# EAGLE board Verteilerplatine_Universal_LoetJumper_2x (EAGLE 9.2.2)
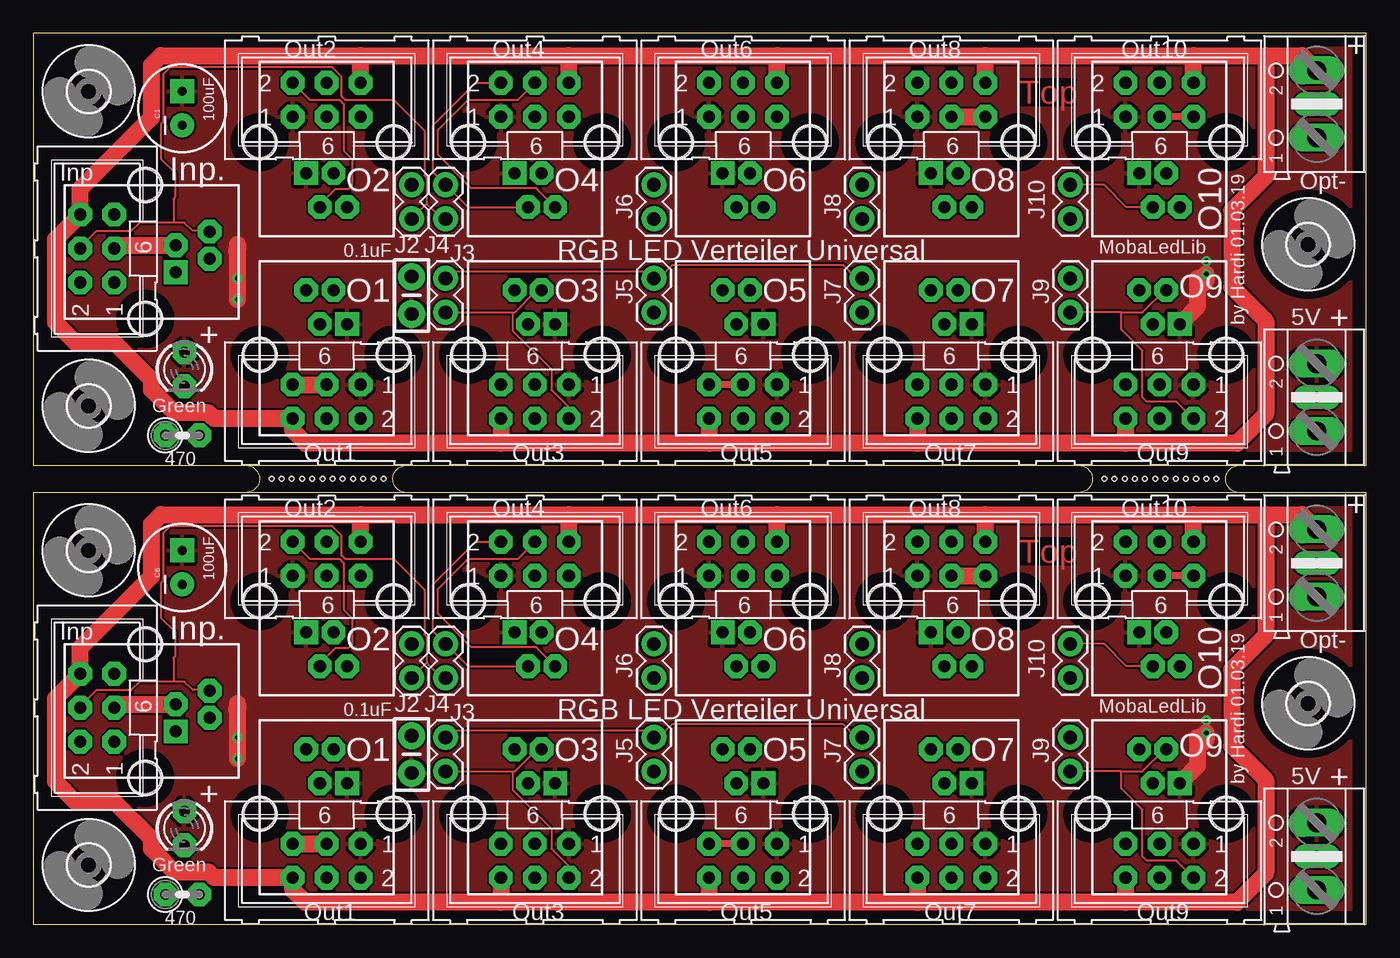
[diagram p0: board, top side]
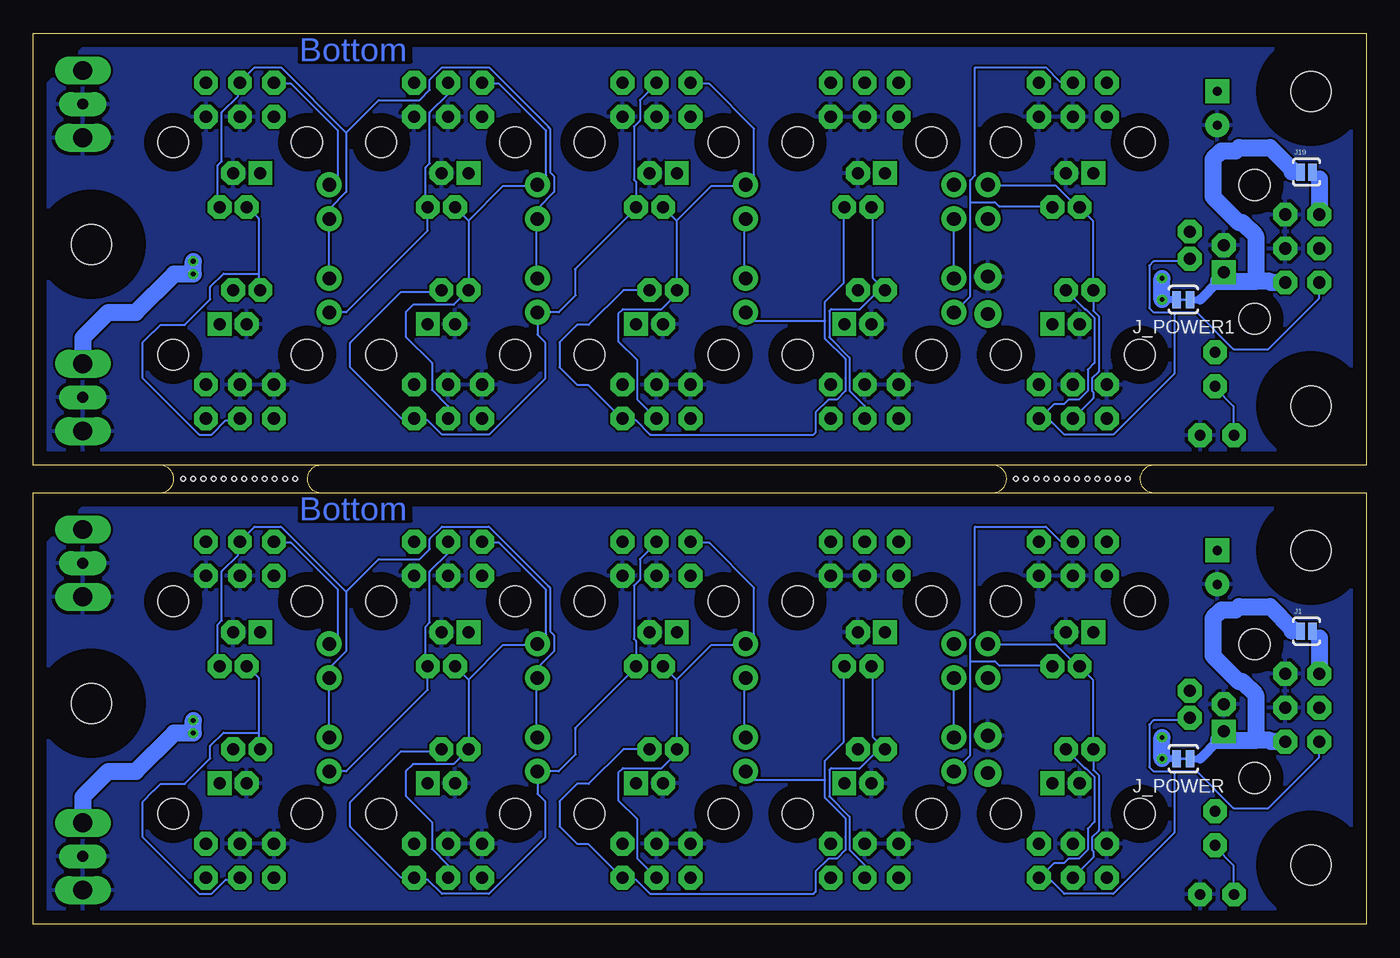
[diagram p1: board, bottom side, seen from below]

Size 99.57 x 66.55 mm. Coordinates in mm from the lower left corner, seen from the top.
Outline: 90.12,32.26 99.57,32.26 99.57,0 0,0 0,32.26 15.9,32.26
Outline: 90.12,32.26 78.13,32.26
Outline: 78.13,32.26 27.89,32.26
Outline: 27.89,32.26 15.9,32.26
Outline: 15.85,34.29 0,34.29 0,66.55 99.57,66.55 99.57,34.29 90.07,34.29
Outline: 15.85,34.29 27.84,34.29
Outline: 27.84,34.29 78.08,34.29
Outline: 78.08,34.29 90.07,34.29
Outline: 27.89,32.26 arc-180 27.84,34.29
Outline: 15.85,34.29 arc-180 15.9,32.26
Outline: 90.12,32.26 arc-180 90.07,34.29
Outline: 78.08,34.29 arc-180 78.13,32.26
Copper layers (1*16): Top 0.035mm / dielectric 1.5mm / Bottom 0.035mm
Design rules "default *": minimum track width 6mil, minimum drill 0.35mm, track to track 6mil, track to pad 6mil, pad to pad 6mil, via to via 6mil, smd to smd 6mil, copper to edge 40mil, drill to drill 6mil, minimum pad ring 10mil, minimum via ring 8mil, stop-mask expansion 4mil, vias tented up to drill 0mil, thermal gap 10mil
Holes 0.35 mm at 17.78,33.27 18.54,33.27 19.3,33.27 20.07,33.27 20.83,33.27 21.59,33.27 22.35,33.27 23.11,33.27 23.88,33.27 24.64,33.27 25.4,33.27 26.16,33.27 80.01,33.27 80.77,33.27 81.53,33.27 82.3,33.27 83.06,33.27 83.82,33.27 84.58,33.27 85.34,33.27 86.11,33.27 86.87,33.27 87.63,33.27 88.39,33.27

## Footprints (pad centres in the part's own frame; a part is rotated, then mirrored left to right if it is on the bottom)
SPARKFUN-CAPACITORS_CPOL-RADIAL-100UF-25V = drill 0.7 pad 1.778 square: 1 1.27,0 | drill 0.7 pad 1.778: 2 -1.27,0
CAP-PTH-SMALL-KIT = drill 1.016 pad 2.032: 1 -1.397,0; 2 1.397,0
3,0 = hole 3: 0,0
ML6 = drill 0.914 pad 1.778 octagon: 1 -2.54,-1.27; 2 -2.54,1.27; 3 0,-1.27; 4 0,1.27; 5 2.54,-1.27; 6 2.54,1.27
RJ10 = drill 0.9 pad 1.778 square: 1 -1.524,-2.3 | drill 0.9 pad 1.778 octagon: 2 -0.508,-4.84; 3 0.508,-2.3; 4 1.524,-4.84 | hole 2.3: 5,0; -5,0
SJ_2S-NO = smd 0.635 x 1.27: 1 -0.45,0; 2 0.45,0
1X02 = drill 1.016 pad 1.88: 1 0,0; 2 2.54,0
SJ_2S-TRACE = smd 0.635 x 1.27: 1 -0.508,0; 2 0.508,0
LED_LED3MM = drill 0.813 pad 1.778 octagon: A -1.27,0; K 1.27,0
RCL_0207/2V = drill 0.813 pad 1.778 octagon: 1 -1.27,0; 2 1.27,0
AK500/2+M = drill 1.397 long: 1 -2.515,0; 2 2.515,0 | drill 0.813 pad 1.778 long: M 0,0

## Placement (x,y rotation side)
C1  100uF  [SPARKFUN-CAPACITORS_CPOL-RADIAL-100UF-25V]  11.11,60.96 90 top
C2  0.1uF  [CAP-PTH-SMALL-KIT]  28.26,46.99 270 top
C8  100uF  [SPARKFUN-CAPACITORS_CPOL-RADIAL-100UF-25V]  11.11,26.67 90 top
C9  0.1uF  [CAP-PTH-SMALL-KIT]  28.26,12.7 270 top
H1  MOUNT-HOLE3.0  [3,0]  4.13,62.23 0 top
H2  MOUNT-HOLE3.0  [3,0]  4.13,38.73 0 top
H3  MOUNT-HOLE3.0  [3,0]  95.25,50.8 0 top
H5  MOUNT-HOLE3.0  [3,0]  4.13,27.94 0 top
H6  MOUNT-HOLE3.0  [3,0]  4.13,4.45 0 top
H8  MOUNT-HOLE3.0  [3,0]  95.25,16.51 0 top
INP1  [ML6]  4.76,50.48 90 top
INP6  [ML6]  4.76,16.19 90 top
INP_  RJ10  [RJ10]  8.33,15.94 90 top
INP_1  RJ10  [RJ10]  8.33,50.23 90 top
J1  SOLDERJUMPERNO  [SJ_2S-NO]  4.45,21.91 0 bottom
J2  SIG  [1X02]  28.26,18.41 90 top
J3  SIG  [1X02]  30.8,13.97 270 top
J4  SIG  [1X02]  30.8,18.41 90 top
J5  SIG  [1X02]  46.35,13.97 270 top
J6  SIG  [1X02]  46.35,18.41 90 top
J7  SIG  [1X02]  61.91,13.97 270 top
J8  SIG  [1X02]  61.91,18.41 90 top
J9  SIG  [1X02]  77.47,13.97 270 top
J10  SIG  [1X02]  77.47,18.41 90 top
J11  SIG  [1X02]  77.47,52.7 90 top
J12  SIG  [1X02]  30.8,48.26 270 top
J13  SIG  [1X02]  30.8,52.7 90 top
J14  SIG  [1X02]  46.35,48.26 270 top
J15  SIG  [1X02]  46.35,52.7 90 top
J16  SIG  [1X02]  61.91,48.26 270 top
J17  SIG  [1X02]  61.91,52.7 90 top
J18  SIG  [1X02]  77.47,48.26 270 top
J19  SOLDERJUMPERNO  [SJ_2S-NO]  4.45,56.2 0 bottom
J20  SIG  [1X02]  28.26,52.7 90 top
J_POWER  SOLDERJUMPERTRACE  [SJ_2S-TRACE]  13.65,12.38 0 bottom
J_POWER1  SOLDERJUMPERTRACE  [SJ_2S-TRACE]  13.65,46.67 0 bottom
LED  Green  [LED_LED3MM]  11.28,7.18 270 top
LED1  Green  [LED_LED3MM]  11.28,41.47 270 top
O1  [ML6]  21.91,4.76 180 top
O2  [ML6]  21.91,27.3 0 top
O3  [ML6]  37.47,4.76 180 top
O4  [ML6]  37.47,27.3 0 top
O5  [ML6]  53.02,4.76 180 top
O6  [ML6]  53.02,27.3 0 top
O7  [ML6]  68.58,4.76 180 top
O8  [ML6]  68.58,27.3 0 top
O9  [ML6]  84.14,4.76 180 top
O10  [ML6]  84.14,27.3 0 top
O11  [ML6]  21.91,61.59 0 top
O12  [ML6]  21.91,39.05 180 top
O13  [ML6]  37.47,39.05 180 top
O14  [ML6]  37.47,61.59 0 top
O15  [ML6]  53.02,39.05 180 top
O16  [ML6]  53.02,61.59 0 top
O17  [ML6]  68.58,39.05 180 top
O18  [ML6]  68.58,61.59 0 top
O19  [ML6]  84.14,39.05 180 top
O20  [ML6]  84.14,61.59 0 top
OUT1  RJ10  [RJ10]  21.91,8.26 180 top
OUT2  RJ10  [RJ10]  21.91,24.13 0 top
OUT3  RJ10  [RJ10]  37.47,8.26 180 top
OUT4  RJ10  [RJ10]  37.47,24.13 0 top
OUT5  RJ10  [RJ10]  53.02,8.26 180 top
OUT6  RJ10  [RJ10]  53.02,24.13 0 top
OUT7  RJ10  [RJ10]  68.58,8.26 180 top
OUT8  RJ10  [RJ10]  68.58,24.13 0 top
OUT9  RJ10  [RJ10]  84.14,8.26 180 top
OUT10  RJ10  [RJ10]  84.14,24.13 0 top
OUT11  RJ10  [RJ10]  21.91,42.55 180 top
OUT12  RJ10  [RJ10]  84.14,58.42 0 top
OUT13  RJ10  [RJ10]  21.91,58.42 0 top
OUT14  RJ10  [RJ10]  37.47,42.55 180 top
OUT15  RJ10  [RJ10]  37.47,58.42 0 top
OUT16  RJ10  [RJ10]  53.02,42.55 180 top
OUT17  RJ10  [RJ10]  53.02,58.42 0 top
OUT18  RJ10  [RJ10]  68.58,42.55 180 top
OUT19  RJ10  [RJ10]  68.58,58.42 0 top
OUT20  RJ10  [RJ10]  84.14,42.55 180 top
R1  470  [RCL_0207/2V]  11.13,36.53 0 top
R21  470  [RCL_0207/2V]  11.13,2.24 0 top
X1  AK500/2+M  [AK500/2+M]  95.89,26.99 90 top
X2  AK500/2+M  [AK500/2+M]  95.89,5.08 90 top
X3  AK500/2+M  [AK500/2+M]  95.89,39.37 90 top
X4  AK500/2+M  [AK500/2+M]  95.89,61.28 90 top

## Library data of the parts
C1 C8 = Sound_MP3-TF-16P_and_WS2811; PROD_ID: CAP-08439
C2 C9 = SparkFun-Capacitors; PROD_ID: CAP-08370
H1-H3 H5 H6 H8 = holes
INP1 INP6 O1-O20 = con-harting-ml; OC_FARNELL: unknown; OC_NEWARK: unknown
INP_ INP_1 OUT1-OUT20 = RJ10; OC_FARNELL: unknown; OC_NEWARK: unknown
J1 J19 J_POWER J_POWER1 = SparkFun-Retired
J2-J18 J20 = SparkFun-Connectors
LED LED1 = Sound_MP3-TF-16P_and_WS2811
R1 R21 = Sound_MP3-TF-16P_and_WS2811; SPICEPREFIX: R
X1-X4 = Arduino_fuer_LEDs_DCC_2

## Nets
5V: C8.1 C9.2 J_POWER.1 LED.A O1.1 O2.1 O3.1 O4.1 O5.1 O6.1 O7.1 O8.1 O9.1 O10.1 OUT1.1 OUT2.1 OUT3.1 OUT4.1 OUT5.1 OUT6.1 OUT7.1 OUT8.1 OUT9.1 OUT10.1 X2.2
5V1: C1.1 C2.2 J_POWER1.1 LED1.A O11.1 O12.1 O13.1 O14.1 O15.1 O16.1 O17.1 O18.1 O19.1 O20.1 OUT11.1 OUT12.1 OUT13.1 OUT14.1 OUT15.1 OUT16.1 OUT17.1 OUT18.1 OUT19.1 OUT20.1 X3.2
GND: C8.2 C9.1 INP6.3 INP6.5 INP_.3 O1.3 O1.5 O2.3 O2.5 O3.3 O3.5 O4.3 O4.5 O5.3 O5.5 O6.3 O6.5 O7.3 O7.5 O8.3 O8.5 O9.3 O9.5 O10.3 O10.5 OUT1.3 OUT2.3 OUT3.3 OUT4.3 OUT5.3 OUT6.3 OUT7.3 OUT8.3 OUT9.3 OUT10.3 R21.2 X1.1 X1.M X2.1 X2.M
GND1: C1.2 C2.1 INP1.3 INP1.5 INP_1.3 O11.3 O11.5 O12.3 O12.5 O13.3 O13.5 O14.3 O14.5 O15.3 O15.5 O16.3 O16.5 O17.3 O17.5 O18.3 O18.5 O19.3 O19.5 O20.3 O20.5 OUT11.3 OUT12.3 OUT13.3 OUT14.3 OUT15.3 OUT16.3 OUT17.3 OUT18.3 OUT19.3 OUT20.3 R1.2 X3.1 X3.M X4.1 X4.M
N$1: J10.2 O9.4 O10.2 OUT9.4 OUT10.2
N$2: J7.2 O6.4 O7.2 OUT6.4 OUT7.2
N$3: INP6.2 INP_.2 O1.2 OUT1.2
N$4: J8.2 O7.4 O8.2 OUT7.4 OUT8.2
N$5: J13.2 O13.4 O14.2 OUT14.4 OUT15.2
N$6: J14.2 O14.4 O15.2 OUT15.4 OUT16.2
N$7: INP6.1 INP_.1 J1.1 J_POWER.2
N$8: J2.2 O1.4 O2.2 OUT1.4 OUT2.2
N$9: J15.2 O15.4 O16.2 OUT16.4 OUT17.2
N$10: INP1.4 INP_1.4 J11.1 J12.1 J13.1 J14.1 J15.1 J16.1 J17.1 J18.1 J20.1 O20.4 OUT12.4
N$11: J3.2 O2.4 O3.2 OUT2.4 OUT3.2
N$12: J18.2 O18.4 O19.2 OUT19.4 OUT20.2
N$13: LED1.K R1.1
N$14: J11.2 O19.4 O20.2 OUT12.2 OUT20.4
N$15: INP1.1 INP_1.1 J19.1 J_POWER1.2
N$16: LED.K R21.1
N$17: J20.2 O11.2 O12.4 OUT11.4 OUT13.2
N$18: J16.2 O16.4 O17.2 OUT17.4 OUT18.2
N$19: J17.2 O17.4 O18.2 OUT18.4 OUT19.2
N$20: INP1.2 INP_1.2 O12.2 OUT11.2
N$21: J12.2 O11.4 O13.2 OUT13.4 OUT14.2
N$47: J4.2 O3.4 O4.2 OUT3.4 OUT4.2
N$50: J5.2 O4.4 O5.2 OUT4.4 OUT5.2
N$51: J6.2 O5.4 O6.2 OUT5.4 OUT6.2
N$56: INP6.4 INP_.4 J2.1 J3.1 J4.1 J5.1 J6.1 J7.1 J8.1 J9.1 J10.1 O10.4 OUT10.4
N$57: J9.2 O8.4 O9.2 OUT8.4 OUT9.2
POWER1: INP1.6 J19.2 O11.6 O12.6 O13.6 O14.6 O15.6 O16.6 O17.6 O18.6 O19.6 O20.6 X4.2
POWER2: INP6.6 J1.2 O1.6 O2.6 O3.6 O4.6 O5.6 O6.6 O7.6 O8.6 O9.6 O10.6 X1.2

## Tracks (layer width: path | path; a pad name or v marks a point on that pad's centre or on a via)
5V  (via drill 0.35)
  Top 1.27: OUT9.1 87,11.89 87,13.97 87.39,13.57 87.63,13.81 v87.63,14.29 | v15.24,12.38 v15.24,13.97 15.24,16.12 | 15.24,16.51 15.24,16.12 | 15.24,16.12 15.17,16.05
  Bottom 0.508: J_POWER.1 v15.24,12.38
  Bottom 1.27: X2.2 95.89,9.53 93.98,11.43 91.92,11.43 89.06,14.29 v87.63,14.29 v87.63,15.24 | v15.24,12.38 v15.24,13.97
  pour Top: 3.49,0.32 98.11,0.32 99.38,1.59 99.38,31.43 98.74,32.07 0,32.07 0,3.81
5V1  (via drill 0.35)
  Top 1.27: OUT20.1 87,46.18 87,48.26 87.39,47.86 87.63,48.1 v87.63,48.58 | v15.24,46.67 v15.24,48.26 15.24,50.41 | 15.24,50.8 15.24,50.41 | 15.24,50.41 15.17,50.34
  Bottom 0.508: J_POWER1.1 v15.24,46.67
  Bottom 1.27: X3.2 95.89,43.81 93.98,45.72 91.92,45.72 89.06,48.58 v87.63,48.58 v87.63,49.53 | v15.24,46.67 v15.24,48.26
  pour Top: 3.49,34.61 98.11,34.61 99.38,35.88 99.38,65.72 98.74,66.36 0,66.36 0,38.1
GND
  Top 0.508: O10.5 O10.3 | INP6.3 6.29,16.45 | O5.3 O5.5
  Top 1.27: O1.5 O1.3 | O8.3 O8.5 | 6.29,16.45 INP_.3
  pour Bottom: 2.22,0.32 98.11,0.32 99.38,1.59 99.38,27.62 94.93,32.07 2.22,32.07 0,29.84 0,2.54
GND1
  Top 0.508: O20.5 O20.3 | INP1.3 6.29,50.74 | O15.3 O15.5
  Top 1.27: O12.5 O12.3 | O18.3 O18.5 | 6.29,50.74 INP_1.3
  pour Bottom: 2.22,34.61 98.11,34.61 99.38,35.88 99.38,61.91 94.93,66.36 2.22,66.36 0,64.14 0,36.83
N$1
  Top 0.152: OUT10.2 81.67,19.29 80.01,20.95 J10.2
  Bottom 0.152: O10.2 81.53,28.5 80.31,28.5 76.81,24.99 76.81,21.61 J10.2 | 82.75,14.33 82.75,18.44 83.52,19.2 OUT10.2 | 82.75,14.33 82.75,13.11 OUT9.4 | O9.4 84.28,3.35 85.19,3.35 86.26,2.29 87.17,2.29 91.44,6.55 91.44,9.14 90.61,9.97 90.59,9.97 90.07,10.5 88.27,10.5 86.36,12.4 86.36,13.34 85.37,14.33 82.75,14.33
N$2
  Bottom 0.152: OUT7.2 69.19,12.95 72.08,12.95 75.89,9.14 75.89,7.32 72.08,3.5 71.17,3.5 O7.2 71.02,3.35 70.1,3.35 69.04,2.29 65.53,2.29 61.34,6.48 61.34,9.18 61.91,9.76 J7.2 60.33,11.43 59.05,12.7 59.05,14.61 59.11,14.66 54.56,19.2 OUT6.4 54.56,19.36 54.56,21.18 54.71,21.34 54.71,25.3 54.25,25.76 54.25,27.28 53.03,28.5 O6.4
N$3
  Bottom 0.152: 24.08,3.81 24.38,3.5 O1.2 24.08,3.81 | 24.08,3.81 23.32,4.57 22.57,4.57 22.23,4.92 21.45,4.92 20.79,5.57 20.79,7.15 20.28,7.66 20.28,11.02 20.94,11.67 20.99,11.67 OUT1.2 | 14.33,11.43 12.65,11.43 9.91,8.69 7.32,8.69 3.5,12.5 3.5,13.56 INP6.2 | 24.08,3.81 22.55,2.29 18.9,2.29 14.33,6.86 14.33,11.43 | INP_.2 13.36,15.24 15.88,15.24 16.19,14.92 16.19,11.75 15.88,11.43 14.33,11.43
N$4
  Bottom 0.152: O8.2 65.99,28.5 64.77,28.5 61.27,24.99 61.27,21.64 61.87,21.03 J8.2 62.03,20.88 64.47,20.88 67.06,18.29 | 67.06,18.29 OUT7.4 68.17,11.98 71.21,11.98 71.75,11.43 71.75,9.6 69.8,7.64 69.8,5.64 68.58,4.42 O7.4 | 67.06,18.29 67.97,19.2 OUT8.2
N$5
  Top 0.152: O14.2 33.02,62.87 29.84,59.69 29.84,56.2 J13.2 32.46,53.58 OUT15.2
  Bottom 0.152: OUT15.2 36.88,53.49 36.88,48.31 36.87,48.31 OUT14.4 35.94,47.37 36.41,47.37 37.81,45.96 39.97,45.96 40.11,45.83 40.11,43.86 38.58,42.34 38.58,39.86 37.47,38.74 O13.4
N$6
  Top 0.152: OUT15.4 37.57,55 32.71,55 30.22,57.49 30.22,59.35 32.47,61.59 36.2,61.59 O14.4
  Bottom 0.152: OUT15.4 39.01,53.49 39.01,47.92 40.41,46.53 40.41,45.09 | 55.51,37.7 55.47,37.64 54.56,37.64 53.49,36.58 41.27,36.58 41.12,36.73 41.12,38.24 40.16,39.2 39.54,39.2 38.89,39.86 38.89,40.78 38.91,40.81 38.91,42.24 40.41,43.73 40.41,45.09 | 55.51,37.7 O15.2 | OUT16.2 55.48,47.38 58.08,44.79 58.95,44.79 60.27,43.47 60.27,41.62 58.95,40.3 58.11,40.3 55.51,37.7 | J14.2 45.72,45.09 40.41,45.09
N$7
  Bottom 0.508: 10.79,13.65 10.63,13.81 | J1.1 5.53,21.91 | J_POWER.2 12.38,12.38
  Bottom 0.762: 12.38,12.38 11.03,13.74 10.88,13.74 10.79,13.65
  Bottom 1.27: INP6.1 7.08,13.65 7.17,13.74 8.26,13.74 | 11.03,13.74 8.26,13.74 | 8.26,13.74 8.26,17.14 9.25,18.14 9.49,18.14 11.43,20.07 11.43,22.86 10.79,23.5 9.74,23.5 9.49,23.74 7.17,23.74 5.53,22.1 5.53,21.91 | INP_.1 10.63,13.81
N$8
  Top 0.152: O2.2 20.64,27.3 22.86,27.3 23.18,26.99 23.18,23.5 23.81,22.86 23.81,20.95 23.5,20.64 22.54,20.64 21.4,19.49 OUT2.2
  Bottom 0.152: 21.03,18.9 21.34,19.2 OUT2.2 | 21.03,18.9 20.42,18.29 20.42,13.11 OUT1.4 20.38,11.55 19.98,11.14 19.98,7 20.48,6.5 20.48,5.57 20.38,5.47 20.38,5.02 O1.4 | 21.03,18.9 OUT2.2 | J2.2 28.19,20.88 23.16,20.88 21.49,19.2 OUT2.2
N$9
  Bottom 0.152: O16.2 50.44,62.79 49.07,62.79 45.72,59.44 45.72,55.93 46.33,55.32 J15.2 46.48,55.17 48.92,55.17 51.51,52.58 | 51.51,52.58 51.51,47.4 OUT16.4 51.36,47.24 52.64,45.96 55.53,45.96 55.88,45.61 55.88,43.57 54.45,42.14 54.45,39.2 O15.4 | 51.51,52.58 52.43,53.49 OUT17.2
N$10
  Top 0.152: 10.48,52.43 11.28,52.43 11.89,51.82 13.11,51.82 INP_1.4 | 10.48,52.43 7.92,52.43 7.28,51.78 7.25,51.8 4.71,51.8 3.5,50.6 INP1.4 | J16.1 61.87,48.31 61.42,48.31 60.5,49.23 47.7,49.23 46.79,48.31 46.48,48.31 J14.1 46.33,48.31 45.87,48.77 30.79,48.77 | J20.1 29.38,53.83 | 29.38,53.83 29.43,53.87 29.43,55.73 29.21,55.95 29.21,59.29 26.9,61.59 23.29,61.59 23.02,61.86 23.02,63.33 22.32,64.03 10.22,64.03 9.69,63.5 9.69,59.93 9.53,59.76 9.53,57.21 10.57,56.16 10.57,54.3 10.48,54.2 10.48,52.43 | 30.79,48.77 30.79,48.31 J12.1 30.79,48.77 | 29.38,53.83 30.48,52.73 30.79,52.73 J13.1
  Bottom 0.152: J14.1 46.48,48.31 46.48,52.58 J15.1 | J16.1 62.03,48.31 62.03,52.58 J17.1 61.87,52.73 61.87,53.49 60.66,54.71 60.66,55.88 60.96,56.19 60.96,59.41 61.09,59.54 61.09,59.56 65.53,64.01 69.04,64.01 69.95,63.09 69.95,62.33 70.71,61.57 73.76,61.57 76.2,59.13 | OUT12.4 85.8,53.65 85.8,56.69 85.5,57 85.5,60.66 84.28,61.87 84.28,62.79 O20.4 84.12,62.94 83.06,64.01 81.08,64.01 76.2,59.13 | 76.2,59.13 76.2,54.71 77.42,53.49 77.42,52.76 J11.1 J18.1 | J12.1 J13.1
N$11
  Top 0.152: J3.2 35.81,11.43 | 35.81,11.43 35.97,11.43 37.49,12.95 37.95,12.95 OUT3.2 | 35.81,11.43 35.81,10.06 38.71,7.16 38.71,5.64 39.93,4.42 39.93,3.5 O3.2
  Bottom 0.152: O2.4 21.95,28.65 22.86,28.65 23.93,29.72 29.21,29.72 29.21,21.66 29.57,21.3 29.57,19.66 | 29.57,19.66 27.74,19.66 27.43,19.36 23.47,19.36 OUT2.4 | 29.57,19.66 29.57,12.65 30.79,11.43 J3.2
N$12
  Top 0.152: O19.2 85.41,39.05 83.19,39.05 82.87,39.37 82.87,42.86 81.28,44.45 81.28,45.72 | 81.28,45.72 J18.2 | OUT20.2 84.53,47.38 82.87,45.72 81.28,45.72
  Bottom 0.152: O18.4 68.58,62.03 69.95,60.66 69.95,56.84 70.26,56.54 70.26,53.8 70.1,53.65 OUT19.4 70.1,51.82 76.2,45.72 J18.2
N$13
  Bottom 0.152: R1.1 9.91,36.58 9.91,38.71 11.28,40.08 LED1.K
N$14
  Top 0.152: OUT12.2 81.67,53.58 80.01,55.24 J11.2
  Bottom 0.152: O20.2 81.53,62.79 80.31,62.79 76.81,59.28 76.81,55.91 J11.2 | 82.75,48.62 82.75,52.73 83.52,53.49 OUT12.2 | 82.75,48.62 82.75,47.4 OUT20.4 | O19.4 84.28,37.64 85.19,37.64 86.26,36.58 87.17,36.58 91.44,40.84 91.44,43.43 90.61,44.26 90.59,44.26 90.07,44.79 88.27,44.79 86.36,46.69 86.36,47.62 85.37,48.62 82.75,48.62
N$15
  Bottom 0.508: 10.79,47.94 10.63,48.1 | J19.1 5.53,56.2 | J_POWER1.2 12.38,46.67
  Bottom 0.762: 12.38,46.67 11.03,48.03 10.88,48.03 10.79,47.94
  Bottom 1.27: INP1.1 7.08,47.94 7.17,48.03 8.26,48.03 | 11.03,48.03 8.26,48.03 | 8.26,48.03 8.26,51.44 9.25,52.43 9.49,52.43 11.43,54.37 11.43,57.15 10.79,57.78 9.74,57.78 9.49,58.03 7.17,58.03 5.53,56.39 5.53,56.2 | INP_1.1 10.63,48.1
N$16
  Bottom 0.152: R21.1 9.91,2.29 9.91,4.42 11.28,5.79 LED.K
N$17
  Top 0.152: O11.2 20.64,61.59 22.86,61.59 23.18,61.28 23.18,57.78 23.81,57.15 23.81,55.24 23.5,54.93 22.54,54.93 21.4,53.78 OUT13.2
  Bottom 0.152: 21.03,53.19 21.34,53.49 OUT13.2 | 21.03,53.19 20.42,52.58 20.42,47.4 OUT11.4 20.38,45.84 19.98,45.43 19.98,41.29 20.48,40.78 20.48,39.86 20.38,39.76 20.38,39.31 O12.4 | 21.03,53.19 OUT13.2 | J20.2 28.19,55.17 23.16,55.17 21.49,53.49 OUT13.2
N$18
  Bottom 0.152: OUT18.2 69.19,47.24 72.08,47.24 75.89,43.43 75.89,41.6 72.08,37.8 71.17,37.8 O17.2 71.02,37.64 70.1,37.64 69.04,36.58 65.53,36.58 61.34,40.77 61.34,43.47 61.91,44.05 J16.2 60.33,45.72 59.05,46.99 59.05,48.9 59.11,48.95 54.56,53.49 OUT17.4 54.56,53.65 54.56,55.47 54.71,55.63 54.71,59.59 54.25,60.05 54.25,61.57 53.03,62.79 O16.4
N$19
  Bottom 0.152: O18.2 65.99,62.79 64.77,62.79 61.27,59.28 61.27,55.93 61.87,55.32 J17.2 62.03,55.17 64.47,55.17 67.06,52.58 | 67.06,52.58 OUT18.4 68.17,46.27 71.21,46.27 71.75,45.72 71.75,43.89 69.8,41.94 69.8,39.93 68.58,38.71 O17.4 | 67.06,52.58 67.97,53.49 OUT19.2
N$20
  Bottom 0.152: 24.08,38.1 24.38,37.8 O12.2 24.08,38.1 | 24.08,38.1 23.32,38.86 22.57,38.86 22.23,39.2 21.45,39.2 20.79,39.86 20.79,41.44 20.28,41.95 20.28,45.31 20.94,45.96 20.99,45.96 OUT11.2 | 14.33,45.72 12.65,45.72 9.91,42.98 7.32,42.98 3.5,46.79 3.5,47.85 INP1.2 | 24.08,38.1 22.55,36.58 18.9,36.58 14.33,41.15 14.33,45.72 | INP_1.2 13.36,49.53 15.88,49.53 16.19,49.21 16.19,46.04 15.88,45.72 14.33,45.72
N$21
  Top 0.152: J12.2 35.81,45.72 | 35.81,45.72 35.97,45.72 37.49,47.24 37.95,47.24 OUT14.2 | 35.81,45.72 35.81,44.35 38.71,41.45 38.71,39.93 39.93,38.71 39.93,37.8 O13.2
  Bottom 0.152: O11.4 21.95,62.94 22.86,62.94 23.93,64.01 29.21,64.01 29.21,55.95 29.57,55.59 29.57,53.95 | 29.57,53.95 27.74,53.95 27.43,53.65 23.47,53.65 OUT13.4 | 29.57,53.95 29.57,46.94 30.79,45.72 J12.2
N$47
  Top 0.152: O4.2 33.02,28.57 29.84,25.4 29.84,21.91 J4.2 32.46,19.29 OUT4.2
  Bottom 0.152: OUT4.2 36.88,19.2 36.88,14.02 36.87,14.02 OUT3.4 35.94,13.08 36.41,13.08 37.81,11.67 39.97,11.67 40.11,11.54 40.11,9.57 38.58,8.05 38.58,5.57 37.47,4.45 O3.4
N$50
  Top 0.152: OUT4.4 37.57,20.71 32.71,20.71 30.22,23.2 30.22,25.06 32.47,27.3 36.2,27.3 O4.4
  Bottom 0.152: OUT4.4 39.01,19.2 39.01,13.63 40.41,12.24 40.41,10.79 | 55.51,3.41 55.47,3.35 54.56,3.35 53.49,2.29 41.27,2.29 41.12,2.44 41.12,3.96 40.16,4.92 39.54,4.92 38.89,5.57 38.89,6.5 38.91,6.52 38.91,7.95 40.41,9.45 40.41,10.79 | 55.51,3.41 O5.2 | OUT5.2 55.48,13.1 58.08,10.5 58.95,10.5 60.27,9.18 60.27,7.33 58.95,6.01 58.11,6.01 55.51,3.41 | J5.2 45.72,10.79 40.41,10.79
N$51
  Bottom 0.152: O6.2 50.44,28.5 49.07,28.5 45.72,25.15 45.72,21.64 46.33,21.03 J6.2 46.48,20.88 48.92,20.88 51.51,18.29 | 51.51,18.29 51.51,13.11 OUT5.4 51.36,12.95 52.64,11.67 55.53,11.67 55.88,11.32 55.88,9.28 54.45,7.85 54.45,4.92 O5.4 | 51.51,18.29 52.43,19.2 OUT6.2
N$56
  Top 0.152: 10.48,18.14 11.28,18.14 11.89,17.53 13.11,17.53 INP_.4 | 10.48,18.14 7.92,18.14 7.28,17.49 7.25,17.51 4.71,17.51 3.5,16.31 INP6.4 | J7.1 61.87,14.02 61.42,14.02 60.5,14.94 47.7,14.94 46.79,14.02 46.48,14.02 J5.1 46.33,14.02 45.87,14.48 30.79,14.48 | J2.1 29.38,19.54 | 29.38,19.54 29.43,19.58 29.43,21.44 29.21,21.66 29.21,25 26.9,27.3 23.29,27.3 23.02,27.57 23.02,29.04 22.32,29.74 10.22,29.74 9.69,29.21 9.69,25.64 9.53,25.47 9.53,22.92 10.57,21.87 10.57,20.01 10.48,19.91 10.48,18.14 | 30.79,14.48 30.79,14.02 J3.1 30.79,14.48 | 29.38,19.54 30.48,18.44 30.79,18.44 J4.1
  Bottom 0.152: J5.1 46.48,14.02 46.48,18.29 J6.1 | J7.1 62.03,14.02 62.03,18.29 J8.1 61.87,18.44 61.87,19.2 60.66,20.42 60.66,21.59 60.96,21.89 60.96,25.12 61.09,25.25 61.09,25.27 65.53,29.72 69.04,29.72 69.95,28.8 69.95,28.04 70.71,27.28 73.76,27.28 76.2,24.84 | OUT10.4 85.8,19.36 85.8,22.4 85.5,22.71 85.5,26.36 84.28,27.58 84.28,28.5 O10.4 84.12,28.65 83.06,29.72 81.08,29.72 76.2,24.84 | 76.2,24.84 76.2,20.42 77.42,19.2 77.42,18.47 J10.1 J9.1 | J3.1 J4.1
N$57
  Top 0.152: O9.2 85.41,4.76 83.19,4.76 82.87,5.08 82.87,8.57 81.28,10.16 81.28,11.43 | 81.28,11.43 J9.2 | OUT9.2 84.53,13.1 82.87,11.43 81.28,11.43
  Bottom 0.152: O8.4 68.58,27.74 69.95,26.36 69.95,22.55 70.26,22.25 70.26,19.51 70.1,19.36 OUT8.4 70.1,17.53 76.2,11.43 J9.2
POWER1
  Top 1.27: X4.2 94.78,64.9 92.08,64.9 | 24.45,64.9 9.53,64.9 8.83,64.2 8.83,60.28 3.49,54.95 INP1.6 1.65,51.18 1.65,44.96 3.17,43.43 6.07,43.43 8.83,40.68 8.83,39.93 10.55,38.2 13.09,38.2 13.51,37.78 O12.6 19.37,36.89 20.32,35.94 34.92,35.94 | 24.45,64.9 40.01,64.9 | 40.01,64.9 55.56,64.9 | 55.56,64.9 71.12,64.9 | 71.12,64.9 86.68,64.9 | 86.68,64.9 92.08,64.9 | O20.6 86.68,64.9 | O18.6 71.12,64.9 | O16.6 55.56,64.9 | O11.6 24.45,64.9 | 92.08,64.9 92.08,55.88 89.53,53.34 89.53,47.62 92.08,45.09 92.08,38.1 89.92,35.94 81.6,35.94 | 81.6,35.94 66.04,35.94 | 66.04,35.94 50.48,35.94 | 50.48,35.94 34.92,35.94 | O15.6 50.48,35.94 | O17.6 66.04,35.94 | O19.6 81.6,35.94 | O14.6 40.01,64.9 | O13.6 34.92,35.94
  Bottom 0.508: J19.2 3.49,55.7
  Bottom 1.27: 3.49,55.7 INP1.6
POWER2
  Top 1.27: X1.2 94.78,30.61 92.08,30.61 | 24.45,30.61 9.53,30.61 8.83,29.91 8.83,25.99 3.49,20.66 INP6.6 1.65,16.89 1.65,10.67 3.17,9.14 6.07,9.14 8.83,6.39 8.83,5.64 10.55,3.91 13.09,3.91 13.51,3.49 O1.6 19.37,2.6 20.32,1.65 34.92,1.65 | 24.45,30.61 40.01,30.61 | 40.01,30.61 55.56,30.61 | 55.56,30.61 71.12,30.61 | 71.12,30.61 86.68,30.61 | 86.68,30.61 92.08,30.61 | O10.6 86.68,30.61 | O8.6 71.12,30.61 | O6.6 55.56,30.61 | O2.6 24.45,30.61 | 92.08,30.61 92.08,21.59 89.53,19.05 89.53,13.34 92.08,10.79 92.08,3.81 89.92,1.65 81.6,1.65 | 81.6,1.65 66.04,1.65 | 66.04,1.65 50.48,1.65 | 50.48,1.65 34.92,1.65 | O5.6 50.48,1.65 | O7.6 66.04,1.65 | O9.6 81.6,1.65 | O4.6 40.01,30.61 | O3.6 34.92,1.65
  Bottom 0.508: J1.2 3.49,21.41
  Bottom 1.27: 3.49,21.41 INP6.6

## Text on the board
Top: Top | Top
Bottom: Bottom | Bottom
tPlace: Inp. | Opt- | RGB LED Verteiler Universal | MobaLedLib | by Hardi 01.03.19 | 5V | + | Inp. | Opt- | RGB LED Verteiler Universal | MobaLedLib | by Hardi 01.03.19 | 5V | +
tNames: Out2 | Out4 | Out6 | Out8 | Out10 | + | Inp | O2 | O4 | O6 | O8 | O10 | J6 | J8 | J10 | J4 | J3 | 0.1uF | J2 | O9 | O1 | O3 | J5 | O5 | J7 | O7 | J9 | + | Out1 | Out3 | Out5 | Out7 | Out9 | Out2 | Out4 | Out6 | Out8 | Out10 | + | Inp | O2 | O4 | O6 | O8 | O10 | J6 | J8 | J10 | J4 | J3 | 0.1uF | J2 | O1 | O3 | J5 | O5 | J7 | O7 | J9 | O9 | + | Out1 | Out3 | Out5 | Out7 | Out9